# Altium PCB PCB_Voltinac_Buck_Final_Revisi_2_2023-10-01.pcbdoc
Units mm, origin at the board's own origin, x right, y up, seen from the top; angles counter-clockwise.
Board outline 255.45 x 248.62 mm, 2 copper layers (Top Layer, Bottom Layer); 55 components, 91 nets, 208 pads, 14 vias.
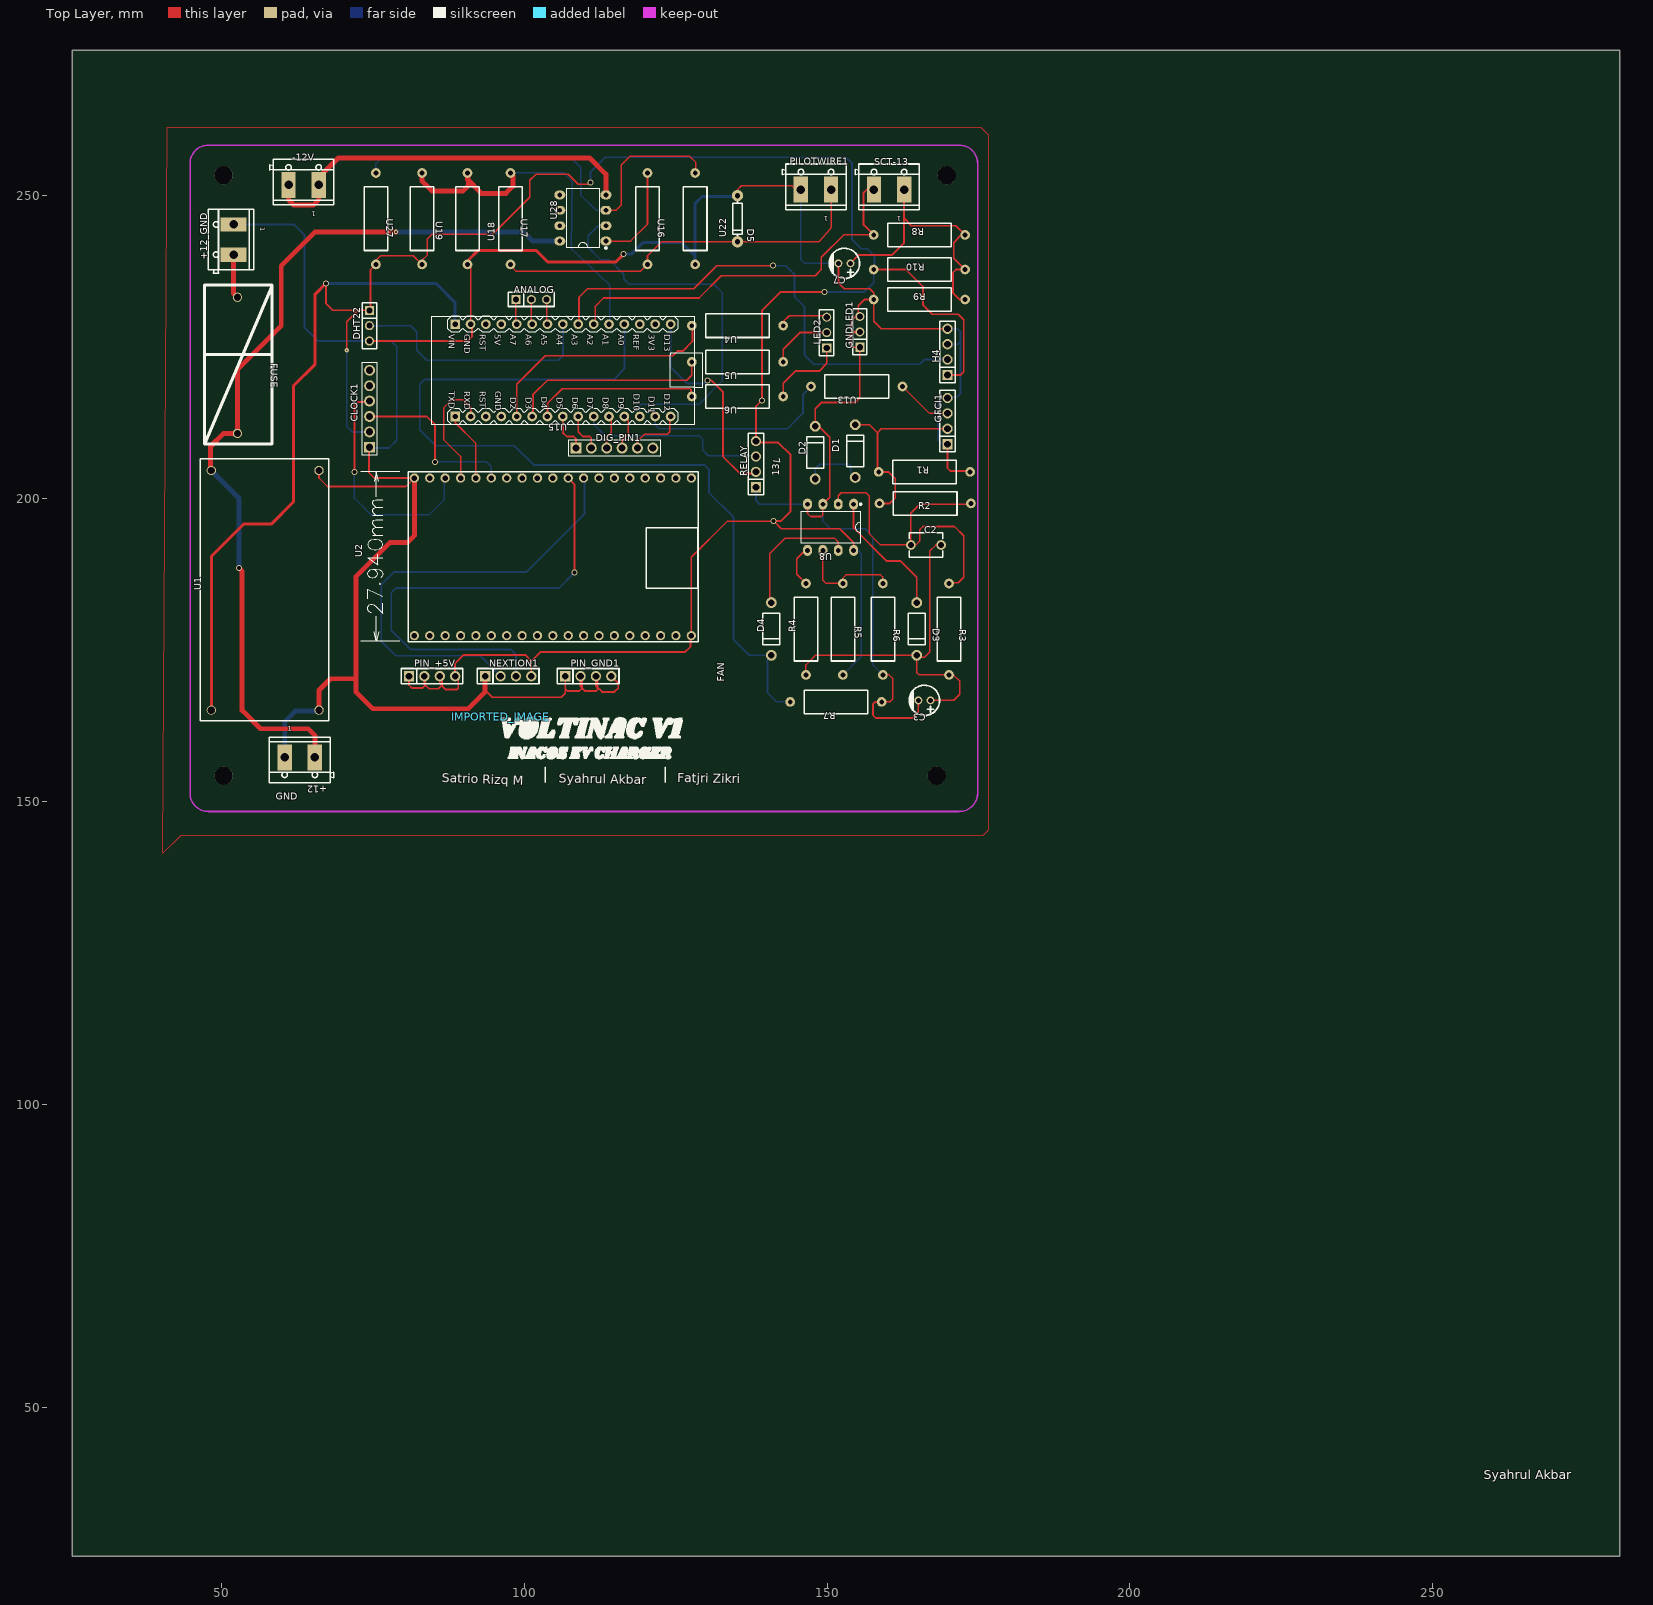
[diagram p0: Top Layer view]
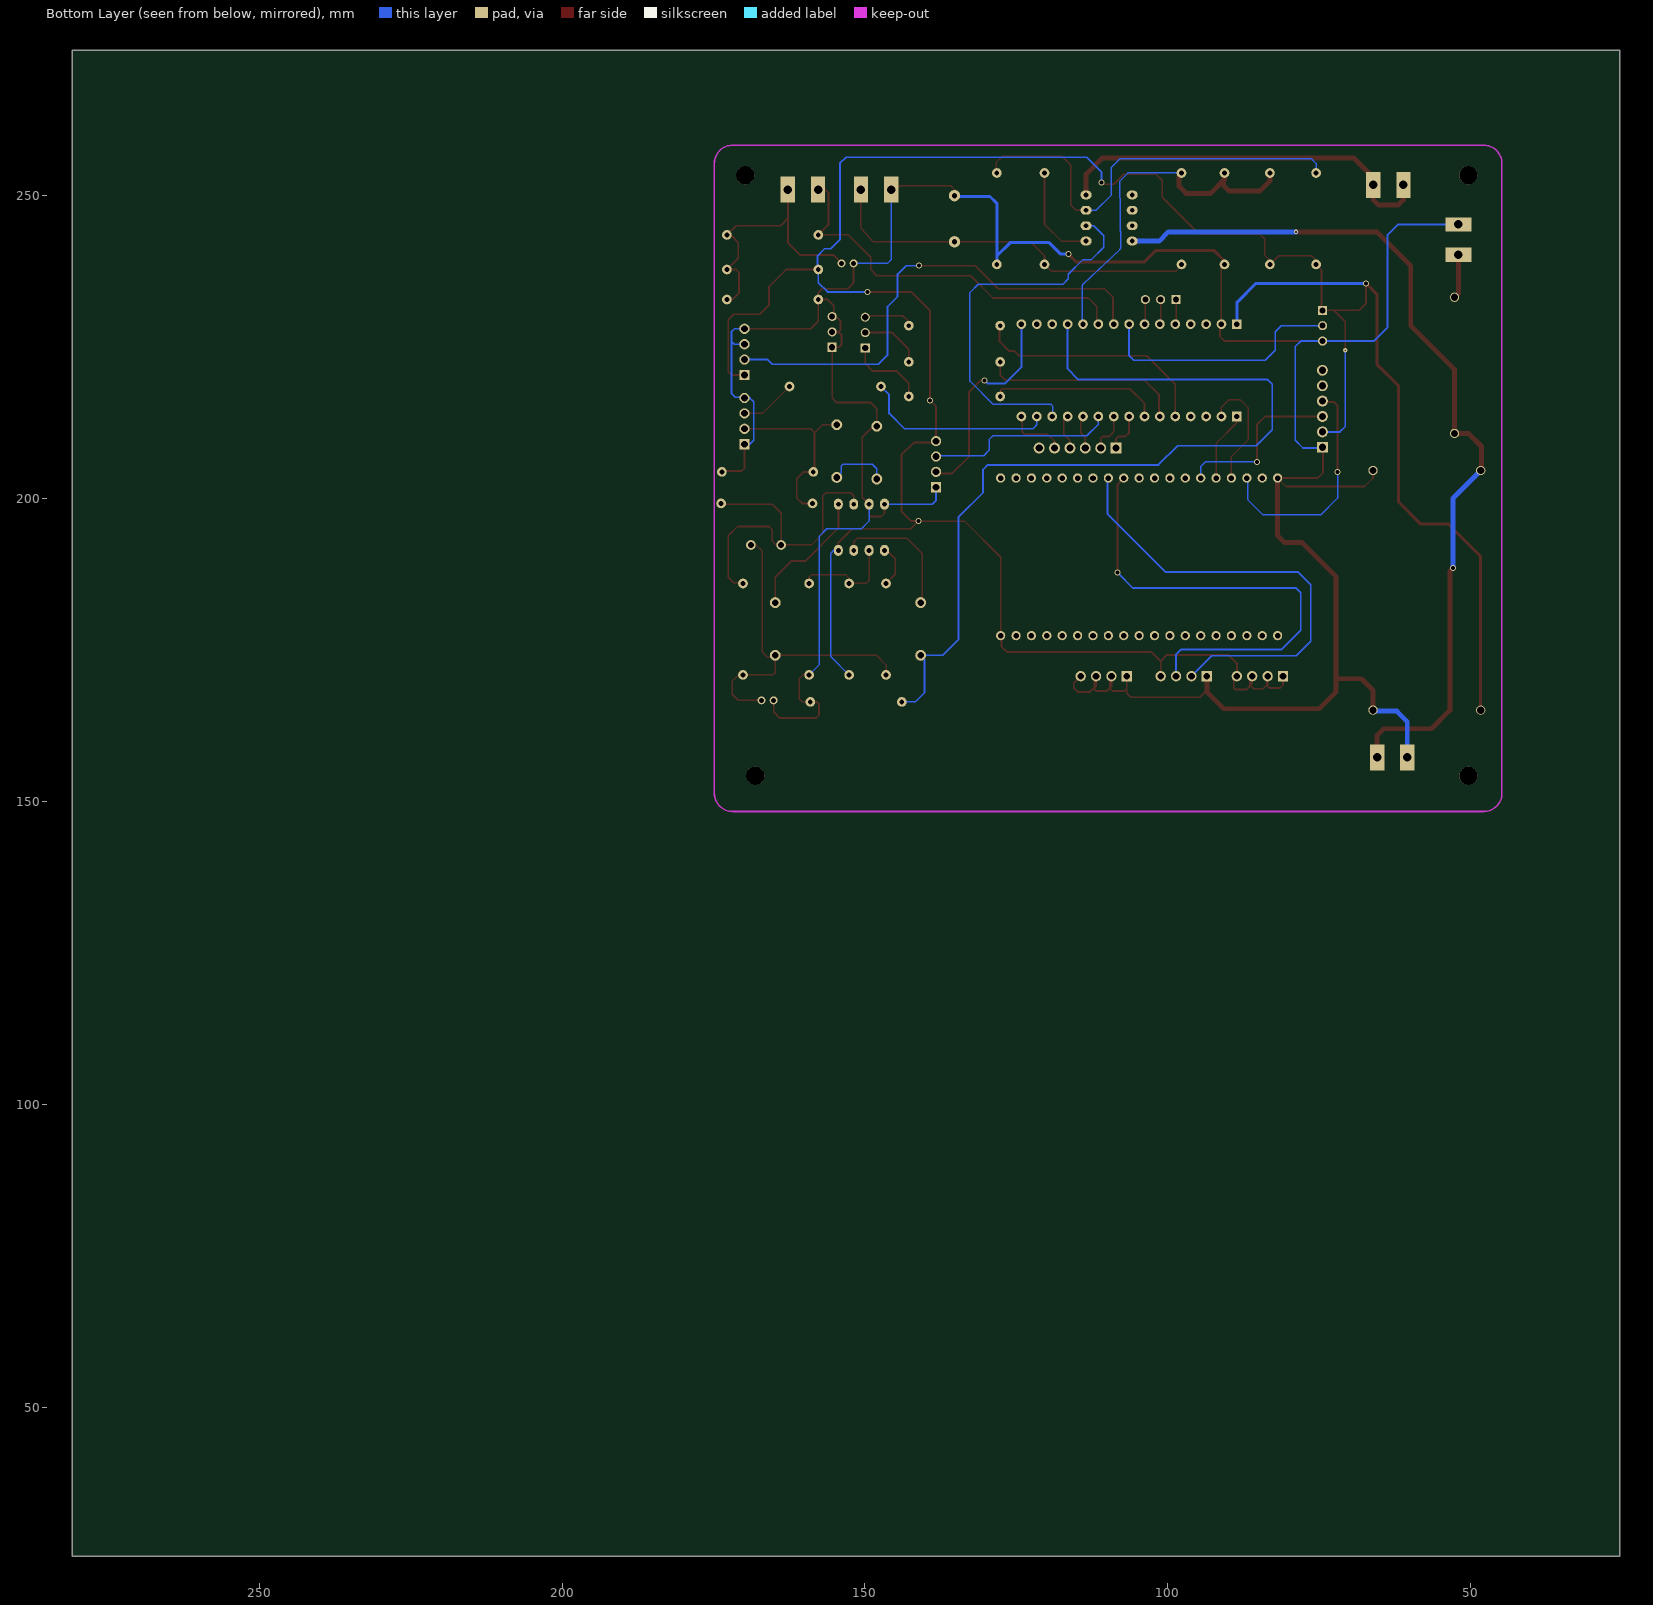
[diagram p1: Bottom Layer view, seen from below]

## Layer stack, top to bottom
Top Layer: signal copper (thickness not stored)
Dielectric: dielectric 0.32, FR-4, Dk 4.8
Bottom Layer: signal copper (thickness not stored)

## Board outline
280.854,25.4 25.4,25.4 25.4,274.02 280.854,274.02

## Components (designator, comment, footprint, x,y, rotation, side; value= is the part's Value field where it differs from the comment)
+12 "+12 GND" TERMINAL_BLOCK_2P_5 62.951,157.307 r180 top
+12_GND "+12V dan GND" TERMINAL_BLOCK_2P_5 52.029,242.778 r90 top
-12V "Just -12" TERMINAL_BLOCK_2P_5 63.586,251.795 r0 top
ANALOG "排母2.54MM 1X3PIN" HDR-TH_3P-P2.54_CS-1165SDIG 101.178,232.872 r0 top
C2 "1uF" CAP-TH_L5.0-W4.0-P5.00-D1.0-FD 166.329,192.359 r0 top
C3 "2.2uF" CAP-TH_BD5.0-P2.00-D0.8-FD 166.075,166.705 r180 top
C7 "2.2uF" CAP-TH_BD5.0-P2.00-D0.8-FD 152.867,238.841 r180 top
CLOCK1 "Header-Male-2.54_1x6" HDR-TH_6P-P2.54-V-M-1 74.473,214.838 r90 top
D1 "1N4148" DO-41_BD2.4-L4.7-P8.70-D0.8-FD 154.645,207.853 r90 top
D2 "1N4148" DO-41_BD2.4-L4.7-P8.70-D0.8-FD 148.041,207.599 r90 top
D3 "1N4148" DO-41_BD2.4-L4.7-P8.70-D0.8-FD 164.805,178.487 r270 top
D4 "1N4148" DO-41_BD2.4-L4.7-P8.70-D0.8-FD 140.802,178.487 r270 top
D5 "TVS 1" DIODE-1N4148-KIT 135.214,246.218 r270 top
DHT22 "排母2.54MM 1X3PIN" HDR-TH_3P-P2.54_CS-1165SDIG 74.448,228.554 r270 top
DIG_PIN1 "Header-Male-2.54_1x6" HDR-TH_6P-P2.54-V-M-1 114.894,208.361 r0 top
FUSE "Fuse INACOS" "FUSE INACOS" 47.33,235.285 r270 top
GFCI1 "Header 1x4" HDR-TH_4P-P2.54-V-M 169.885,212.806 r90 top
GNDLED1 "排母2.54MM 1X3PIN" HDR-TH_3P-P2.54_CS-1165SDIG 155.407,227.538 r90 top
H4 "Header-Male ZMPT" HDR-TH_4P-P2.54-V-M 169.885,224.236 r90 top
IMPORTED_IMAGE "IMPORTED_IMAGE" IMPORTED_IMAGE 96.147,163.961 r0 top
LED2 "排母2.54MM 1X3PIN" HDR-TH_3P-P2.54_CS-1165SDIG 149.946,227.411 r90 top
NEXTION1 "Conect ESP" HDR-TH_4P-P2.54-V-M 97.368,170.693 r0 top
PILOTWIRE1 "PW" TERMINAL_BLOCK_2P_5 148.168,251.033 r0 top
PIN_+5V "Header-Male +5V" HDR-TH_4P-P2.54-V-M 84.795,170.693 r0 top
PIN_GND1 "Header-Male GND" HDR-TH_4P-P2.54-V-M 110.576,170.693 r0 top
R1 "330" RES-TH_BD3.9-L10.5-P15.10-D0.6 166.075,204.424 r180 top
R2 "1k" RES-TH_BD3.9-L10.5-P15.10-D0.6 166.202,199.217 r0 top
R3 "100k" RES-TH_BD3.9-L10.5-P15.10-D0.6 170.139,178.452 r270 top
R4 "100" RES-TH_BD3.9-L10.5-P15.10-D0.6 146.517,178.452 r90 top
R5 "100k" RES-TH_BD3.9-L10.5-P15.10-D0.6 152.613,178.452 r270 top
R6 "20k" RES-TH_BD3.9-L10.5-P15.10-D0.6 159.217,178.452 r270 top
R7 "10k" RES-TH_BD3.9-L10.5-P15.10-D0.6 151.47,166.451 r180 top
R8 "33" RES-TH_BD3.9-L10.5-P15.10-D0.6 165.249,243.54 r180 top
R9 "33" RES-TH_BD3.9-L10.5-P15.10-D0.6 165.249,232.872 r0 top
R10 "33" RES-TH_BD3.9-L10.5-P15.10-D0.6 165.249,237.825 r180 top
RELAY "Header-Male +5V" HDR-TH_4P-P2.54-V-M 138.262,205.694 r90 top
SCT-13 "CON_TERMINAL_SCT013" TERMINAL_BLOCK_2P_5 160.233,251.033 r0 top
U1 "buck" BUCK 57.236,184.866 r90 top
U2 "ESP32-DEVKITC" ESP32DEVKITC 81.874,177.373 r90 top
U4 "330" RES-TH_BD3.9-L10.5-P15.10-D0.6 135.214,228.554 r180 top
U5 "330" RES-TH_BD3.9-L10.5-P15.10-D0.6 135.214,222.585 r180 top
U6 "330" RES-TH_BD3.9-L10.5-P15.10-D0.6 135.214,216.87 r180 top
U8 "LM358P" DIP-8_L9.4-W6.4-P2.54-LS9.1-BL 150.581,195.28 r180 top
U13 "330" RES-TH_BD3.9-L10.5-P15.10-D0.6 154.899,218.521 r180 top
U15 "ARDUINO_NANO" COMM-TH_ARDUINO_NANO 106.385,221.188 r180 top
U16 "1k" RES-TH_BD3.9-L10.5-P15.10-D0.6 120.355,246.218 r270 top
U17 "100k" RES-TH_BD3.9-L10.5-P15.10-D0.6 97.749,246.218 r270 top
U18 "47k" RES-TH_BD3.9-L10.5-P15.10-D0.6 90.637,246.218 r90 top
U19 "22k" RES-TH_BD3.9-L10.5-P15.10-D0.6 83.144,246.218 r90 top
U22 "10k" RES-TH_BD3.9-L10.5-P15.10-D0.6 128.229,246.218 r90 top
U27 "10k" RES-TH_BD3.9-L10.5-P15.10-D0.6 75.524,246.218 r270 top
U28 "LM358P" DIP-8_L9.4-W6.4-P2.54-LS9.1-BL 109.687,246.334 r90 top
? "" ? 42.296,184.866 r0 top
? "" ? 57.172,151.864 r0 top
? "" ? 76.255,190.454 r0 top

## Footprints (in the part's own frame and the unit in brackets; to place one, negate y for a bottom-side part, rotate by r counter-clockwise, add the part's x,y. Pads: shape width x height; smd on the part's side, far side on the other; paste and mask are expansions set on the pad)
BUCK [mil]
  round 60 hole 47.24 paste+0 mask+19.68: 1(778.75,350) 2(778.75,-350) 3(-778.75,350) 4(-778.75,-350)
  silkscreen extent -849,-413 856,423
CAP-TH_BD5.0-P2.00-D0.8-FD [mm]
  round 1.3 hole 0.8 paste+0 mask+0.051: 1(-1,0) 2(1,0)
  silkscreen extent -2.5,-2.5 2.5,2.5
CAP-TH_L5.0-W4.0-P5.00-D1.0-FD [mm]
  round 1.6 hole 1 paste+0 mask+0.051: 1(-2.499,0) 2(2.499,0)
  silkscreen extent -2.75,-2.01 2.75,1.99
COMM-TH_ARDUINO_NANO [mm]
  rect 1.6x1.6 hole 0.9 paste+0 mask+0.051: 1(17.78,7.62) 30(17.78,-7.62)
  round 1.6 hole 0.9 paste+0 mask+0.051: 2(15.24,7.62) 3(12.7,7.62) 4(10.16,7.62) 5(7.621,7.62) 6(5.08,7.62) 7(2.541,7.62) 8(0,7.62) 9(-2.539,7.62) 10(-5.08,7.62) 11(-7.619,7.62) 12(-10.16,7.62) 13(-12.699,7.62) 14(-15.24,7.62) 15(-17.78,7.62) 16(-17.78,-7.62) 17(-15.241,-7.62) 18(-12.7,-7.62) 19(-10.161,-7.62) 20(-7.62,-7.62) 21(-5.081,-7.62) 22(-2.54,-7.62) 23(-0.001,-7.62) 24(2.54,-7.62) 25(5.079,-7.62) 26(7.62,-7.62) 27(10.159,-7.62) 28(12.7,-7.62) 29(15.24,-7.62)
  silkscreen extent -23.11,-8.97 21.67,8.97
DIODE-1N4148-KIT [mil]
  round 74 hole 35.4 paste+0 mask+2: A(-150,0) C(150,0)
  silkscreen extent -110,-30 110,30
DIP-8_L9.4-W6.4-P2.54-LS9.1-BL [mm]
  oval 1.46x1.825 hole 0.8 paste+0 mask+0.051: 1(-3.81,-3.81) 2(-1.27,-3.81) 3(1.27,-3.81) 4(3.81,-3.81) 5(3.81,3.81) 6(1.27,3.81) 7(-1.27,3.81) 8(-3.81,3.81)
  silkscreen extent -5.1,-3.96 4.87,2.67
DO-41_BD2.4-L4.7-P8.70-D0.8-FD [mm]
  round 1.8 hole 1.1 paste+0 mask+0.051: 1(-4.35,0) 2(4.35,0)
  silkscreen extent -2.6,-1.4 2.6,1.4
ESP32DEVKITC [mm]
"FUSE INACOS" [mil]
  round 60 hole 47.24 paste+0 mask+19.68: 1(80,210) 2(965,210)
  silkscreen extent 0,-5 1035,435
HDR-TH_3P-P2.54_CS-1165SDIG [mm]
  rect 1.5x1.5 hole 1 paste+0 mask+0.051: 1(-2.54,0)
  round 1.5 hole 1 paste+0 mask+0.051: 2(0,0) 3(2.54,0)
  silkscreen extent -3.8,-1.15 3.8,1.2
HDR-TH_4P-P2.54-V-M [mm]
  rect 1.7x1.7 hole 1.1 paste+0 mask+0.051: 1(-3.81,0)
  round 1.7 hole 1.1 paste+0 mask+0.051: 2(-1.27,0) 3(1.27,0) 4(3.81,0)
  silkscreen extent -5.08,-1.27 5.08,1.27
HDR-TH_6P-P2.54-V-M-1 [mm]
  rect 1.8x1.8 hole 1.2 paste+0 mask+0.051: 1(-6.35,0)
  round 1.8 hole 1.2 paste+0 mask+0.051: 2(-3.81,0) 3(-1.27,0) 4(1.27,0) 5(3.81,0) 6(6.35,0)
  silkscreen extent -7.62,-1.27 7.62,1.27
IMPORTED_IMAGE [mm]
  silkscreen extent 0,-7 30,0
RES-TH_BD3.9-L10.5-P15.10-D0.6 [mm]
  round 1.6 hole 0.8 paste+0 mask+0.05: 1(-7.55,0) 2(7.55,0)
  silkscreen extent -5.25,-1.95 5.25,1.95
TERMINAL_BLOCK_2P_5 [mm]
  rect 2.38x4.285 hole 1.402 paste+0 mask+0.051: 1(2.489,0) 2(-2.489,0)
  silkscreen extent -5.59,-3.3 5,4.22
? [mm]

## Free pads (board coordinates)
  round 1.524 hole 0.914 paste+0 mask+0.051: 1(81.874,177.389) 2(84.414,177.389) 3(86.954,177.389) 4(89.494,177.389) 5(92.034,177.389) 6(94.574,177.389) 7(97.114,177.389) 8(99.654,177.389) 9(102.194,177.389) 10(104.734,177.389) 11(107.274,177.389) 12(109.814,177.389) 13(112.354,177.389) 14(114.894,177.389) 15(117.434,177.389) 16(119.974,177.389) 17(122.514,177.389) 18(125.054,177.389) 19(127.594,177.389) 20(127.594,203.408) 21(125.054,203.408) 22(122.514,203.408) 23(119.974,203.408) 24(117.434,203.408) 25(114.894,203.408) 26(112.354,203.408) 27(109.814,203.408) 28(107.274,203.408) 29(104.734,203.408) 30(102.194,203.408) 31(99.654,203.408) 32(97.114,203.408) 33(94.574,203.408) 34(92.034,203.408) 35(89.494,203.408) 36(86.954,203.408) 37(84.414,203.408) 38(81.874,203.408)
  round 3 hole 3 unplated paste+0: ""(50.378,154.259) ""(50.378,253.382) ""(168.107,154.259) ""(169.758,253.382)

## Via types
v1: diameter 1, hole 0.65, Top Layer to Bottom Layer, tented both sides, 12 vias
v2: diameter 0.7, hole 0.305, Top Layer to Bottom Layer, tented both sides, 2 vias

## Nets (pads, with @x,y where several pads share a name; then routed paths per layer and width w, separated by ;. In a path a pad name is that pad's centre, name@x,y a point inside that pad or via, vN(x,y) a via of type N, cw(c..) or ccw(c..) an arc to the next point about the centre after c; other vN are vias at no path point)
32K: CLOCK1.6
+5V: CLOCK1.2 DHT22.1 H4.1 NEXTION1.4 pad.19 PIN_+5V.1 PIN_+5V.2 PIN_+5V.3 PIN_+5V.4 R5.2 R10.2 RELAY.4 U1.3 U8.8 U15.30 U19.1 U27.2 | length 495.6
  Top Layer w0.254: U27.2 75.524,239.349 76.286,240.111 81.701,240.111 U19.1 83.144,239.349 84.033,240.238 84.033,242.905 84.795,243.667 94.828,243.667 100.924,249.763 100.924,252.557 101.94,253.573 107.274,253.573 108.925,251.922 110.703,251.922 v1(110.957,252.176) ; pad.19 127.594,190.327 133.563,196.296 v1(141.183,196.296) 142.453,195.026 152.105,195.026 154.391,192.74 U8.8
  Top Layer w0.3: v1(67.269,235.539) 67.269,232.237 68.412,231.094 DHT22.1 72.603,231.094 70.698,229.189 v2(70.698,224.49) ; DHT22.1@74.635,231.094 74.635,237.779 U27.2 ; PIN_+5V.1 80.985,169.245 81.493,168.737 83.144,168.737 83.652,169.245 83.652,170.566 PIN_+5V.2 83.525,169.372 84.287,168.61 85.811,168.61 86.446,169.245 86.446,170.312 PIN_+5V.3 86.065,169.499 87.081,168.483 88.859,168.483 89.113,168.737 89.113,170.185 PIN_+5V.4 88.605,172.801 90.002,174.198 100.162,174.198 101.178,173.182 ; NEXTION1.4 101.178,173.182 ; pad.19 127.467,177.262 127.467,175.595 126.578,174.706 102.702,174.706 101.178,173.182 ; v1(141.183,196.296) 142.326,196.296 143.977,197.947 143.977,207.218 141.945,209.25 138.516,209.25 RELAY.4 138.262,215.219 v1(139.278,216.235) 139.278,231.094 142.326,234.142 v1(149.565,234.142) ; R10.2 163.027,237.825 165.821,235.031 165.821,231.983 167.345,230.459 171.663,230.459 172.552,229.57 172.552,220.934 172.044,220.426 H4.1
  Top Layer w0.5: U1.3 48.346,190.454 53.68,195.788 58.252,195.788 61.935,199.471 61.935,218.648 65.491,222.204 65.491,233.761 v1(67.269,235.539)
  Bottom Layer w0.254: R5.2 155.661,173.95 155.661,190.962 155.153,191.47 U8.8
  Bottom Layer w0.3: v2(70.698,224.49) 70.698,211.917 71.587,211.028 CLOCK1.2 ; v1(110.957,252.176) 110.957,253.954 113.37,256.367 153.121,256.367 154.137,255.351 154.137,242.778 155.661,241.254 156.677,241.254 157.82,240.111 157.82,237.945 R10.2 ; v1(149.565,234.142) 156.169,234.142 157.693,235.666 R10.2@157.701,237.825
  Bottom Layer w0.5: v1(67.269,235.539) 85.43,235.539 88.605,232.364 U15.30
+12_GND_2: +12_GND.2 FUSE.1 | length 7.3
  Top Layer w0.8: +12_GND.2 52.029,233.888 FUSE.1
+12V: +12.2 FUSE.2 U1.1 U28.8 | length 148
  Top Layer w0.8: U1.1 48.219,204.773 48.219,208.615 50.378,210.774 FUSE.2 52.664,221.315 59.903,228.554 59.903,238.46 65.491,244.048 v2(78.826,244.048) ; v1(52.918,188.549) 53.426,188.041 53.426,165.054 56.474,162.006 64.348,162.006 65.44,160.914 +12.2
  Bottom Layer w0.8: U1.1 52.918,200.074 v1(52.918,188.549) ; v2(78.826,244.048) 99.908,244.048 101.432,242.524 U28.8
-12V: -12V.1 -12V.2 U28.4 | length 65.1
  Top Layer w0.8: -12V.2 61.097,249.331 61.935,248.493 65.237,248.493 66.075,249.331 -12V.1 66.075,253.014 69.301,256.24 110.83,256.24 113.497,253.573 U28.4
A5: ANALOG.3 U15.24 | length 4.1
  Top Layer w0.254: ANALOG.3 103.718,228.935 U15.24
A6: ANALOG.2 U15.25 | length 4.1
  Top Layer w0.254: ANALOG.2 101.178,228.935 U15.25
A7: ANALOG.1 U15.26 | length 4.1
  Top Layer w0.254: ANALOG.1 98.638,228.935 U15.26
D2_1: D1.1 D2.1 | length 10.2
  Bottom Layer w0.254: D2.1 148.041,204.932 148.803,205.694 153.629,205.694 153.883,205.44 153.883,204.265 D1.1
D3_2: C2.2 C3.1 D3.2 R3.2 R4.1 | length 60.1
  Top Layer w0.254: R4.1 146.517,172.547 148.108,174.137 D3.2 ; C3.1 170.901,166.705 171.917,167.721 171.917,169.88 170.894,170.902 R3.2 ; C2.2 167.98,192.359 166.964,191.343 166.964,174.706 166.075,173.817 165.126,173.817 D3.2 ; R3.2@170.139,170.903 165.186,170.896 164.805,171.277 D3.2
D4: DIG_PIN1.1 U15.8 | length 6.8
  Top Layer w0.3: U15.8 106.385,210.901 107.02,210.266 108.163,210.266 108.544,209.885 DIG_PIN1.1
D5: DIG_PIN1.2 U15.9 | length 6.8
  Top Layer w0.3: U15.9 108.925,211.028 109.687,210.266 110.83,210.266 111.084,210.012 DIG_PIN1.2
D8: DIG_PIN1.3 U15.11 | length 5.7
  Top Layer w0.254: DIG_PIN1.3 113.624,210.139 114.386,210.901 114.386,213.187 U15.11
D9: DIG_PIN1.4 U15.12 | length 5.9
  Top Layer w0.254: DIG_PIN1.4 116.164,209.631 117.18,210.647 117.18,212.933 U15.12
D12: DIG_PIN1.5 U15.15 | length 9.7
  Top Layer w0.254: DIG_PIN1.5 118.704,209.504 119.847,210.647 123.657,210.647 124.038,211.028 124.038,213.441 U15.15
D13: DIG_PIN1.6
DHT_PIN: DHT22.2 U15.23 | length 41.6
  Bottom Layer w0.3: DHT22.2 81.239,228.554 82.255,227.538 82.255,224.49 83.906,222.839 105.623,222.839 106.385,223.601 U15.23
GFCI1_2: D1.2 GFCI1.2 R1.2 R2.1 | length 31.9
  Top Layer w0.254: D1.2 157.026,212.203 158.328,210.901 ; R1.2 158.328,204.621 158.328,210.901 ; GFCI1.2 158.963,211.536 158.328,210.901
  Top Layer w0.3: R1.2 160.106,204.424 161.249,203.281 161.249,200.106 160.36,199.217 R2.1
GFCI1_3: GFCI1.3 U13.1 | length 9.3
  Top Layer w0.254: U13.1 166.894,214.076 GFCI1.3
GFCI_INT: D4.2 R7.2 U15.19 | length 148
  Bottom Layer w0.254: D4.2 140.167,173.502 140.167,167.975 141.691,166.451 R7.2
  Bottom Layer w0.3: U15.19 116.545,221.442 114.767,219.664 83.525,219.664 82.763,218.902 82.763,211.409 85.43,208.742 98.384,208.742 101.559,205.567 129.753,205.567 130.515,204.805 130.515,200.995 134.579,196.931 134.579,176.738 137.179,174.137 D4.2
GFCI_TEST: U13.2 U15.14 | length 32.1
  Bottom Layer w0.3: U15.14 121.625,212.171 122.26,211.536 143.469,211.536 146.009,214.076 146.009,217.181 U13.2
GND: +12.1 +12_GND.1 C3.2 C7.2 CLOCK1.1 D2.2 D5.A DHT22.3 GFCI1.1 GFCI1.4 GNDLED1.1 GNDLED1.2 GNDLED1.3 H4.3 H4.4 NEXTION1.1 pad.38 PILOTWIRE1.2 PIN_GND1.1 PIN_GND1.2 PIN_GND1.3 PIN_GND1.4 R1.1 R6.2 R7.1 R9.1 RELAY.1 U1.2 U1.4 U8.3 U8.4 U15.29 U18.1 U22.1 | length 531.5
  Top Layer w0.254: U1.2 66.126,203.408 67.523,202.011 80.477,202.011 pad.38 ; U18.1 91.145,238.16 U15.29 ; D5.A 135.214,251.033 135.849,251.668 144.231,251.668 144.866,251.033 PILOTWIRE1.2 ; U8.4 146.771,197.566 147.279,197.058 149.057,197.058 149.311,197.312 U8.3 150.454,200.233 150.454,210.139 148.644,211.949 D2.2 ; R7.1 160.36,166.451 160.868,166.959 160.868,170.261 160.226,170.902 R6.2
  Top Layer w0.3: CLOCK1.1@74.381,208.488 74.381,204.297 75.27,203.408 pad.38 ; DHT22.3@74.635,226.014 90.637,226.014 91.399,226.776 91.399,228.554 U15.29 ; NEXTION1.1 93.558,168.356 94.701,167.213 106.131,167.213 106.766,167.848 PIN_GND1.1 106.766,168.61 107.147,168.229 109.052,168.229 109.56,168.737 109.56,170.439 PIN_GND1.2 109.306,168.991 110.068,168.229 111.846,168.229 112.1,168.483 112.1,170.439 PIN_GND1.3 111.846,169.118 112.862,168.102 114.894,168.102 115.529,168.737 115.529,169.55 PIN_GND1.4 ; D2.2 148.041,214.838 149.057,215.854 154.645,215.854 155.407,216.616 GNDLED1.1 154.264,224.998 153.883,225.379 153.883,227.03 154.391,227.538 GNDLED1.2 155.28,227.411 154.518,227.411 154.01,227.919 154.01,229.316 154.772,230.078 GNDLED1.3 155.153,230.332 155.153,231.856 156.169,232.872 R9.1 157.7,229.309 158.963,228.046 H4.4 ; C7.2 151.866,235.65 152.867,234.65 157.058,234.65 157.693,234.015 R9.1@157.701,232.872 ; R7.1 157.947,166.451 157.566,166.07 157.566,164.292 158.074,163.784 158.963,163.784 164.043,163.784 165.059,164.8 C3.2 ; GFCI1.1 169.885,205.059 170.393,204.551 173.498,204.551 R1.1
  Top Layer w0.5: U18.1 90.637,239.222 92.415,241 101.94,241 103.845,239.095 115.148,239.095 v1(116.418,240.365)
  Top Layer w0.8: U1.4 66.126,168.356 68.031,170.261 72.254,170.261 ; pad.38 81.874,193.883 80.731,192.74 77.81,192.74 72.254,187.183 72.254,170.261 ; NEXTION1.1 93.558,168.102 90.764,165.308 75.016,165.308 72.254,168.07 72.254,170.261
  Bottom Layer w0.254: PILOTWIRE1.2 145.679,239.425 146.263,238.841 C7.2 ; U8.3 149.311,196.296 150.581,195.026 156.296,195.026 157.566,193.756 157.566,172.553 R6.2
  Bottom Layer w0.3: +12_GND.1 61.986,245.267 63.713,243.54 63.713,228.3 65.999,226.014 DHT22.3 78.064,226.014 78.953,225.125 78.953,209.631 77.683,208.361 74.472,208.361 CLOCK1.1 ; RELAY.1 138.262,199.725 138.897,199.09 U8.4 ; GFCI1.1 168.996,208.996 168.361,209.631 168.361,215.981 168.996,216.616 GFCI1.4 170.012,216.743 171.409,216.743 172.044,217.378 172.044,227.538 171.536,228.046 H4.4 ; H4.3 171.561,225.506 172.044,225.989
  Bottom Layer w0.5: v1(116.418,240.365) 117.688,240.365 119.593,242.27 126.03,242.27 128.229,240.071 U22.1 128.229,248.747 129.372,249.89 135.076,249.89 D5.A
  Bottom Layer w0.8: +12.1 60.462,163.2 62.189,164.927 65.967,164.927 U1.4
HIJAU: LED2.3 U4.1 | length 8.4
  Top Layer w0.3: U4.1 142.764,229.246 143.723,230.205 149.692,230.205 LED2.3
KUNING: LED2.2 U5.1 | length 10.4
  Top Layer w0.3: U5.1 142.764,224.674 145.501,227.411 LED2.2
MERAH: LED2.1 U6.1 | length 13.3
  Top Layer w0.3: U6.1 142.764,219.086 144.739,221.061 148.676,221.061 149.946,222.331 LED2.1
PWM: U15.13 U28.2 | length 62.9
  Bottom Layer w0.254: U28.2 112.227,245.064 110.576,243.413 110.576,241.508 112.608,239.476 114.005,239.476 116.418,237.063 116.418,236.301 117.307,235.412 131.277,235.412 132.674,234.015 132.674,219.41 128.864,215.6 119.339,215.6 118.958,215.219 118.958,213.695 U15.13
PWM_READ: U15.20 U17.1 U18.2 U19.2 | length 61.6
  Top Layer w0.8: U19.2 83.144,252.43 84.795,250.779 89.875,250.779 90.764,251.668 90.764,253.641 U18.2 90.637,252.684 92.923,250.398 96.987,250.398 98.13,251.541 98.13,253.387 U17.1
  Bottom Layer w0.254: U17.1 106.57,253.768 107.909,252.43 107.782,241.381 107.909,241.127 114.005,235.412 114.132,235.031 114.132,228.935 U15.20
R2_2: C2.1 R2.2 R3.1 U8.2 | length 58.1
  Top Layer w0.254: U8.2 151.851,200.487 152.359,200.995 156.423,200.995 156.931,200.487 156.931,194.264 158.836,192.359 C2.1 ; R3.1 170.273,186.136 171.663,186.136 172.552,187.025 172.552,193.883 171.028,195.407 165.821,195.407 165.313,194.899 165.313,192.994 164.678,192.359 C2.1 ; R2.2 173.625,199.09 165.313,199.09 163.83,197.606 C2.1
RELAY: RELAY.3 U15.10 | length 31.3
  Bottom Layer w0.254: U15.10 111.465,212.298 113.37,210.393 128.864,210.393 129.499,209.758 129.499,207.98 130.388,207.091 138.135,207.091 RELAY.3
RELAY2: RELAY.2 U15.16 | length 35.2
  Top Layer w0.3: v1(130.261,219.537) 130.896,219.537 132.801,217.632 132.801,206.964 135.595,204.17 138.008,204.17 RELAY.2
  Bottom Layer w0.3: U15.16 124.165,221.696 126.832,219.029 129.753,219.029 v1(130.261,219.537)
RX: pad.35 U15.2 | length 19.8
  Top Layer w0.254: pad.35 89.494,206.964 86.7,209.758 86.7,214.965 88.097,216.362 89.875,216.362 91.145,215.092 U15.2
RX2: NEXTION1.3 pad.28 | length 79.7
  Top Layer w0.3: pad.28 108.29,202.392 v1(108.29,187.787)
  Bottom Layer w0.3: NEXTION1.3 98.638,174.325 97.876,175.087 81.239,175.087 78.064,178.262 78.064,184.485 78.826,185.247 105.75,185.247 v1(108.29,187.787)
S$9108: 
S$9112: 
SCL: CLOCK1.4 pad.36 | length 38.6
  Top Layer w0.3: v1(71.968,204.424) 71.968,215.346 72.603,215.981 74.254,215.981 CLOCK1.4@74.381,216.108
  Bottom Layer w0.254: v1(71.968,204.424) 71.968,200.106 74.762,197.312 84.287,197.312 86.827,199.852 86.827,203.281 pad.36
SCT-13_1: C7.1 R8.1 R9.2 R10.1 SCT-13.1 | length 50.7
  Top Layer w0.3: C7.1 155.264,240.238 160.741,240.238 162.722,242.219 SCT-13.1 162.722,246.258 163.916,245.064 171.275,245.064 R8.1 172.171,243.54 170.901,242.27 170.901,239.723 R10.1 171.282,237.825 170.774,237.317 170.774,234.015 171.917,232.872 R9.2
SCT_INPUT: R8.2 SCT-13.2 U15.21 | length 64.6
  Top Layer w0.254: U15.21 111.719,229.062 111.719,231.729 113.116,233.126 128.864,233.126 132.547,236.809 148.041,236.809 149.057,237.825 149.057,239.857 152.74,243.54 R8.2@157.636,243.54
  Top Layer w0.3: R8.2 156.042,245.197 156.042,250.525 156.55,251.033 SCT-13.2
SDA: CLOCK1.3 pad.33 | length 29.1
  Top Layer w0.3: CLOCK1.3@74.381,213.568 83.906,213.568 85.303,212.171 v1(85.303,206.075)
  Bottom Layer w0.254: v1(85.303,206.075) 93.812,206.075 94.574,205.313 pad.33
SQW: CLOCK1.5
TX: pad.34 U15.1 | length 11.6
  Top Layer w0.254: U15.1 88.605,212.552 92.034,209.123 pad.34
TX2: NEXTION1.2 pad.27 | length 75.7
  Bottom Layer w0.3: NEXTION1.2 92.72,174.071 78.826,174.071 76.413,176.484 76.413,185.755 78.572,187.914 100.416,187.914 109.941,197.439 109.941,203.281 pad.27
U2_1: pad.1
U2_2: pad.2
U2_3: pad.3
U2_4: pad.4
U2_5: pad.5
U2_6: pad.6
U2_7: pad.7
U2_8: pad.8
U2_9: pad.9
U2_10: pad.10
U2_11: pad.11
U2_12: pad.12
U2_13: pad.13
U2_14: pad.14
U2_15: pad.15
U2_16: pad.16
U2_17: pad.17
U2_18: pad.18
U2_20: pad.20
U2_21: pad.21
U2_22: pad.22
U2_23: pad.23
U2_24: pad.24
U2_25: pad.25
U2_26: pad.26
U2_29: pad.29
U2_30: pad.30
U2_31: pad.31
U2_32: pad.32
U2_37: pad.37
U8_1: D3.1 U8.1 | length 21.9
  Top Layer w0.3: U8.1 154.391,195.153 159.852,189.692 162.138,189.692 164.805,187.025 D3.1
U8_5: R4.2 U8.5 | length 7.1
  Top Layer w0.254: R4.2 144.993,187.526 144.993,190.073 146.39,191.47 U8.5
U8_6: R5.1 R6.1 U8.6 | length 17.4
  Top Layer w0.254: U8.6 149.311,186.517 149.819,186.009 R5.1 152.613,186.898 153.121,187.406 158.836,187.406 159.217,187.025 R6.1
U8_7: D4.1 U8.7 | length 22.2
  Top Layer w0.254: D4.1 140.548,183.091 140.548,190.962 143.088,193.502 151.216,193.502 151.851,192.867 U8.7
U15_3: U15.3
U15_4: U15.4
U15_5: U4.2 U15.5 | length 39.9
  Top Layer w0.3: U15.5 98.765,218.902 103.464,223.601 124.546,223.601 125.308,224.363 126.197,224.363 127.791,225.957 U4.2@127.791,228.554
U15_6: U5.2 U15.6 | length 33.4
  Top Layer w0.3: U15.6 101.432,213.695 101.432,217.124 103.845,219.537 126.832,219.537 127.664,220.369 U5.2
U15_7: U6.2 U15.7 | length 28
  Top Layer w0.3: U15.7 103.845,215.727 106.258,218.14 127.34,218.14 127.538,217.942 U6.2@127.538,216.87
U15_17: U15.17
U15_18: U15.18
U15_27: U15.27
U15_28: U15.28
U16_2: D5.C PILOTWIRE1.1 U16.2 U17.2 | length 63.7
  Top Layer w0.254: U17.2 97.749,238.46 98.638,237.571 119.258,237.571 U16.2 120.355,240.111 122.652,242.408 D5.C 148.687,242.408 150.581,244.556 150.657,244.988 PILOTWIRE1.1
U28_1: U16.1 U28.1 | length 16.5
  Top Layer w0.254: U28.1 117.561,242.524 120.355,245.318 U16.1
U28_3: U22.2 U27.1 U28.3 | length 70.7
  Top Layer w0.254: U28.3 115.148,247.604 116.037,248.493 116.037,255.097 117.434,256.494 127.34,256.494 128.356,255.478 128.356,253.895 U22.2
  Bottom Layer w0.254: U27.1 75.524,255.351 76.286,256.113 107.909,256.113 109.306,254.716 109.306,250.144 111.846,247.604 U28.3
U28_5: U28.5
U28_6: U28.6
U28_7: U28.7
ZMPT_OUT: H4.2 U15.22 | length 81.4
  Top Layer w0.254: U15.22 109.052,228.935 109.052,233.253 110.449,234.65 127.975,234.65 131.785,238.46 v1(141.056,238.46)
  Bottom Layer w0.3: v1(141.056,238.46) 143.215,238.46 144.612,237.063 144.612,233.38 146.263,231.729 146.263,223.728 147.787,222.204 165.313,222.204 166.075,222.966 H4.2

## Polygon pours and split planes (outlines as drawn)
GND on Top Layer (solid): 41.107,261.32 175.346,261.32 176.616,260.05 176.616,145.242 175.727,144.353 43.266,144.353 40.345,141.432

## Keep-outs
Keep-Out Layer:
  lines w0.254: 44.848,151.356 ccw(c47.848,151.356) 47.848,148.356 ; 44.848,255.356 cw(c47.848,255.356) 47.848,258.356 ; 171.848,148.356 ccw(c171.848,151.356) 174.848,151.356 ; 171.848,258.356 cw(c171.848,255.356) 174.848,255.356

## Silkscreen, mask and mechanical layers (free items; w line width, h text height)
Top Overlay:
  lines w0.254: 80.858,176.357 80.858,204.424 128.737,204.424 128.737,176.357 80.858,176.357 ; 120.164,185.183 120.164,195.216 128.673,195.216 128.673,185.183 120.164,185.183
  lines w0.3 net S$9108: 123.276,153.214 123.276,155.627
  lines w0.3 net S$9112: 103.464,153.214 103.464,155.627
  text "7" at 141.003,206.601 h1.14 r281
  text "13" at 142.135,203.789 h1.14 r90
  text "FAN" at 132.991,169.753 h1.14 r90
  text "Satrio Rizq M" at 86.42,153.217 h1.5 r358
  text "Syahrul Akbar" at 105.737,153.128 h1.5 r359
  text "Fatjri Zikri" at 125.295,153.145 h1.5 r359
  text "GND" at 59.014,150.285 h1.14
  text "Syahrul Akbar" at 258.404,38.1 h1.5

## Text inside footprints (layer, text, board x,y; h text height)
+12: Top Overlay "1" at 60.944,161.726 h0.76
+12_GND: Top Overlay "1" at 56.449,244.784 h0.76 r270
-12V: Top Overlay "1" at 65.593,247.375 h0.76 r180
PILOTWIRE1: Top Overlay "1" at 150.175,246.613 h0.76 r180
SCT-13: Top Overlay "1" at 162.24,246.613 h0.76 r180
U15: Top Overlay "D13" at 123.117,227.178 h1 r270; Top Overlay "3V3" at 120.577,227.178 h1 r270; Top Overlay "REF" at 118.037,227.178 h1 r270; Top Overlay "A0" at 115.497,227.178 h1 r270; Top Overlay "A1" at 112.957,227.178 h1 r270; Top Overlay "A2" at 110.417,227.178 h1 r270; Top Overlay "A3" at 107.877,227.178 h1 r270; Top Overlay "A4" at 105.337,227.178 h1 r270; Top Overlay "A5" at 102.797,227.178 h1 r270; Top Overlay "A6" at 100.257,227.178 h1 r270; Top Overlay "A7" at 97.717,227.178 h1 r270; Top Overlay "5V" at 95.177,227.178 h1 r270; Top Overlay "RST" at 92.637,227.178 h1 r270; Top Overlay "GND" at 90.097,227.178 h1 r270; Top Overlay "VIN" at 87.557,227.178 h1 r270; Top Overlay "D12" at 123.137,217.289 h1 r270; Top Overlay "D11" at 120.597,216.88 h1 r270; Top Overlay "D10" at 118.057,217.289 h1 r270; Top Overlay "D9" at 115.517,216.715 h1 r270; Top Overlay "D8" at 112.977,216.76 h1 r270; Top Overlay "D7" at 110.437,216.76 h1 r270; Top Overlay "D6" at 107.897,216.715 h1 r270; Top Overlay "D5" at 105.357,216.76 h1 r270; Top Overlay "D4" at 102.817,216.806 h1 r270; Top Overlay "D3" at 100.277,216.76 h1 r270; Top Overlay "D2" at 97.737,216.76 h1 r270; Top Overlay "GND" at 95.197,217.743 h1 r270; Top Overlay "RST" at 92.657,217.698 h1 r270; Top Overlay "RXD" at 90.117,217.698 h1 r270; Top Overlay "TXD" at 87.577,217.698 h1 r270